# Altium PCB sonata-xl-panel.PcbDoc
Units mil, origin at the board's own origin, x right, y up, seen from the top; angles counter-clockwise.
Board outline 6653.54 x 3997.24 mil, 8 copper layers (Top Layer, Int1 (Sign), Int2 (GND), Int3 (Sign), Int4 (Sign), Int5 (PWR), Int6 (Sign), Bottom Layer), stack 60.424 mil thick; 4 components, 0 nets, 8 pads, 0 vias.
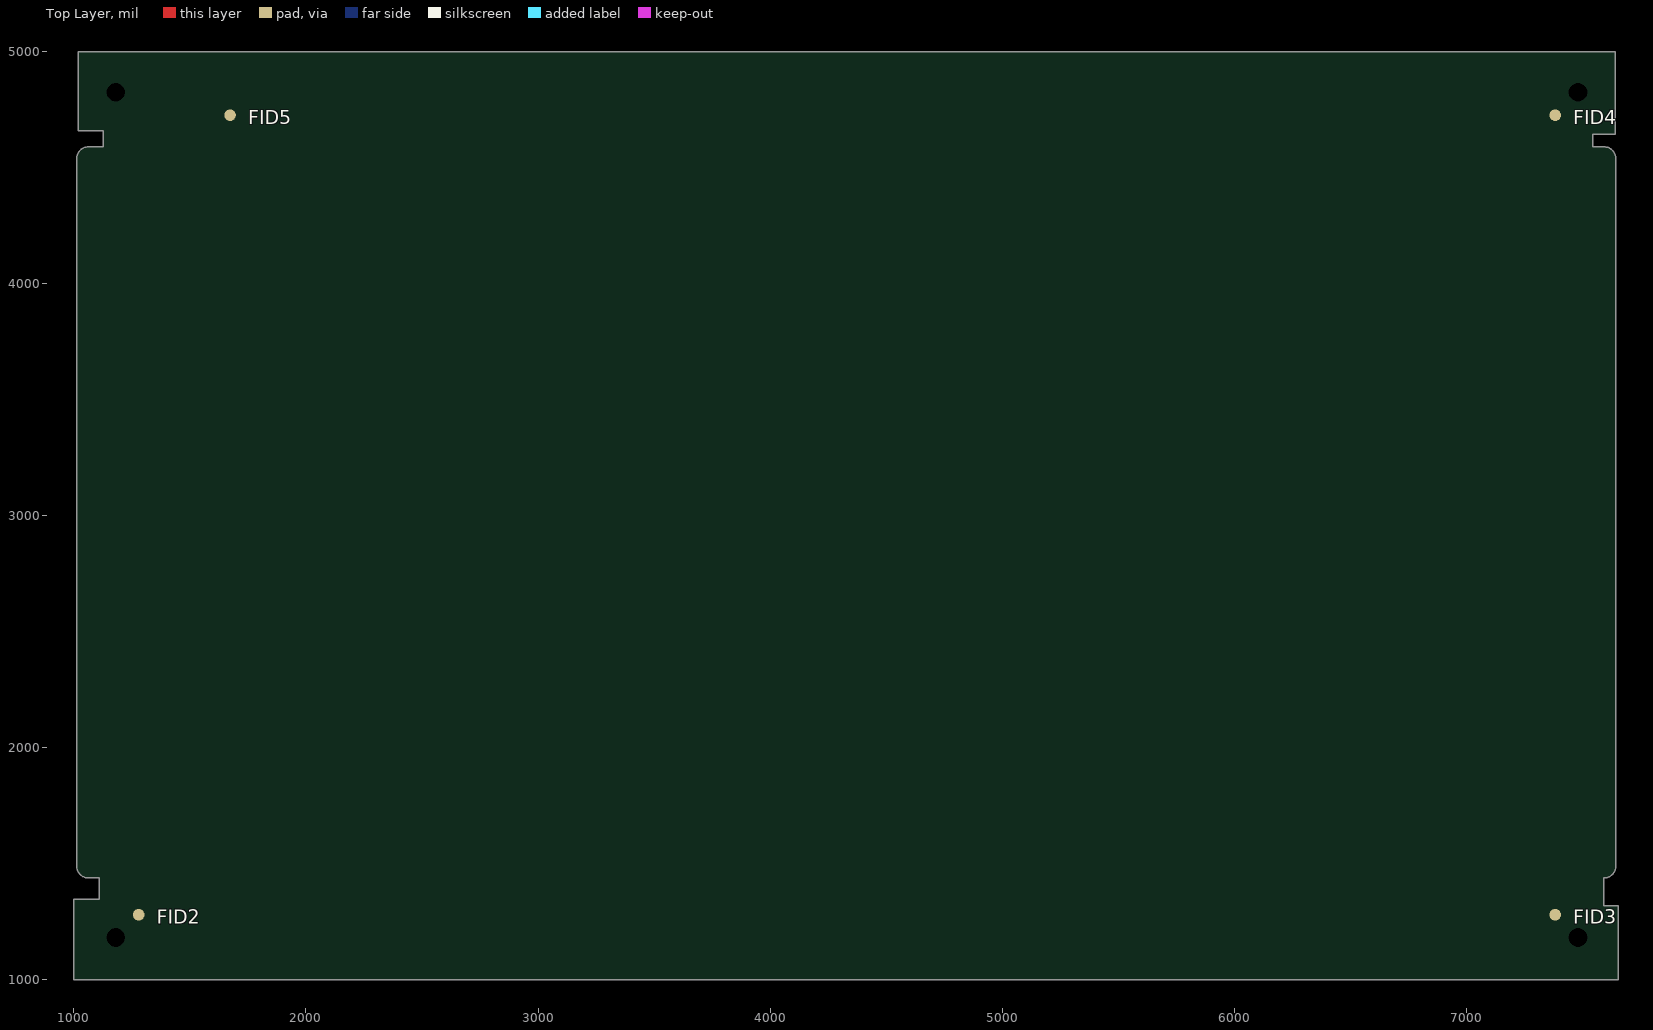
[diagram p0: Top Layer view]
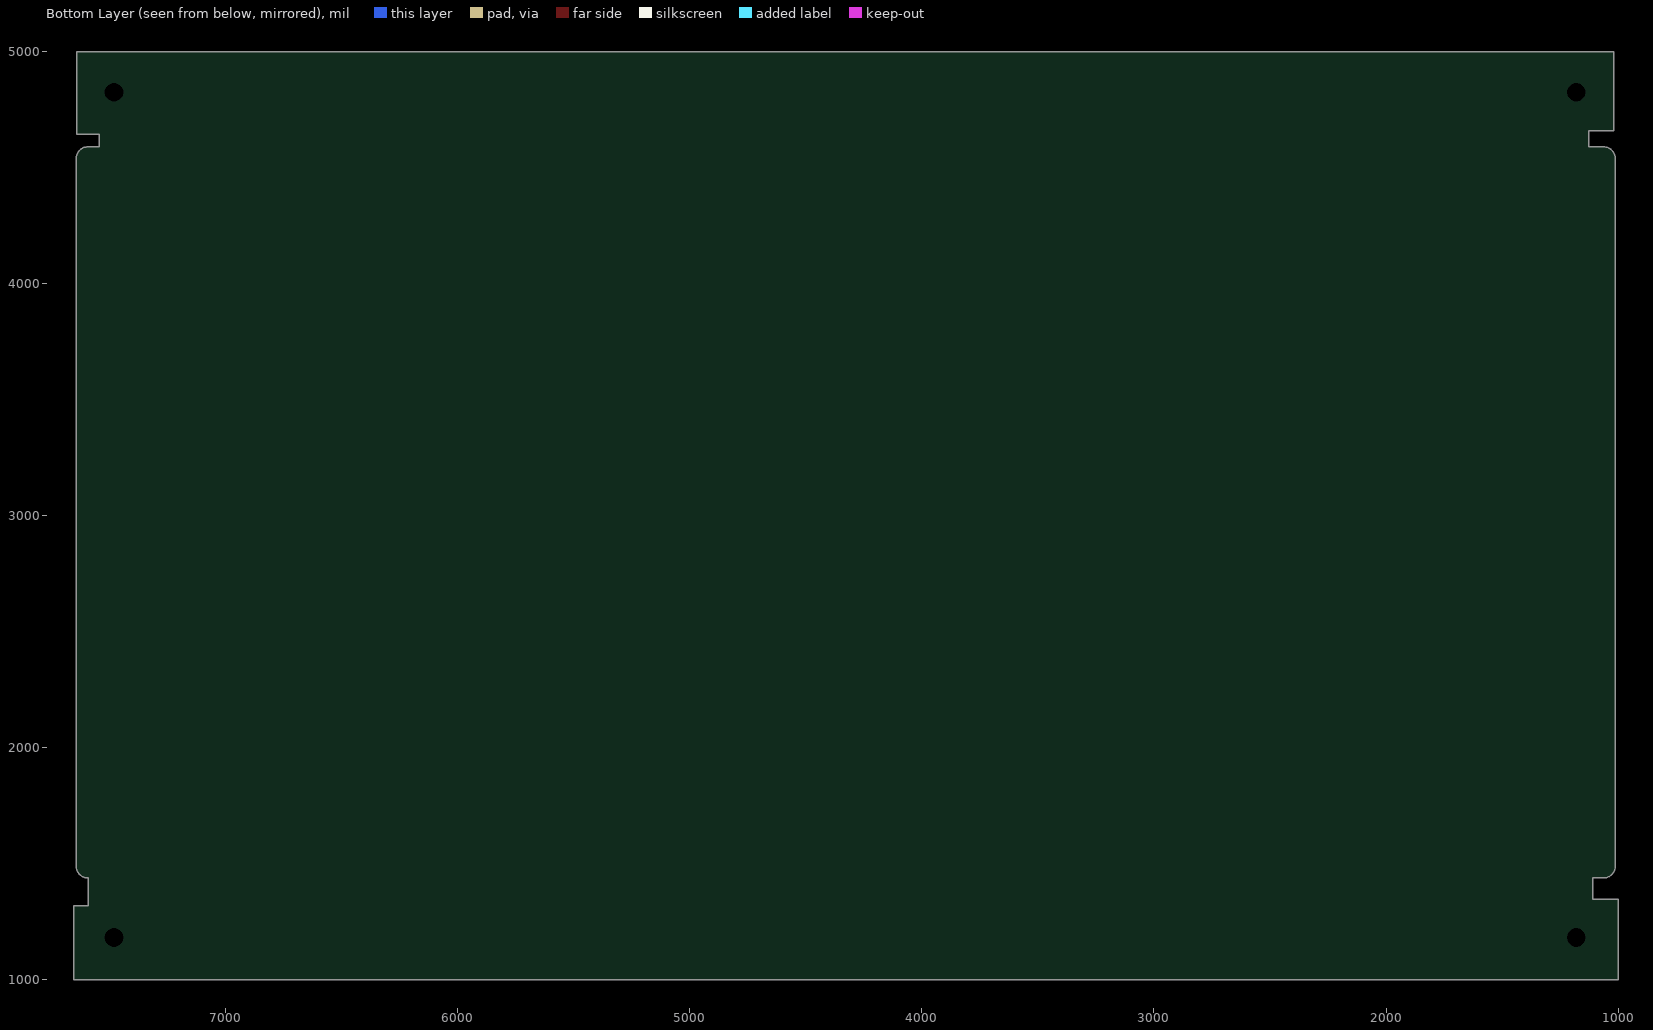
[diagram p1: Bottom Layer view, seen from below]

## Layer stack, top to bottom
Top Solder: solder mask 1, SM-001, Dk 4
Top Layer: signal copper 1.378
Dielectric 1: prepreg 2.8, PP-006, Dk 4.1
Dielectric 2: prepreg 2.8, PP-006, Dk 4.1
Int1 (Sign): signal copper 1.378
Dielectric 3: core 9, Core-027, Dk 4.5
Int2 (GND): signal copper 1.378
Dielectric 4: prepreg 2.8, PP-006, Dk 4.1
Dielectric 5: prepreg 2.8, PP-006, Dk 4.1
Int3 (Sign): signal copper 1.378
Dielectric 6: core 9, Core-027, Dk 4.5
Int4 (Sign): signal copper 1.378
Dielectric 7: prepreg 2.8, PP-006, Dk 4.1
Dielectric 8: prepreg 2.8, PP-006, Dk 4.1
Int5 (PWR): signal copper 1.378
Dielectric 9: core 9, Core-027, Dk 4.5
Int6 (Sign): signal copper 1.378
Dielectric 10: prepreg 2.8, PP-006, Dk 4.1
Dielectric 11: prepreg 2.8, PP-006, Dk 4.1
Bottom Layer: signal copper 1.378
Bottom Solder: solder mask 1, SM-001, Dk 4

## Board outline
1000,1000 1000,1346.46 1110.24,1346.46 1110.24,1438.19 1062.99,1438.19 cw(c1062.99,1488.19) 1012.99,1488.19 1012.99,4537.8 cw(c1062.99,4537.8) 1062.99,4587.8 1125.98,4587.8 1125.98,4657.48 1019.68,4657.48 1019.68,4997.24 1067.13,4997.24 7600.79,4997.24 7641.73,4997.24 7641.73,4641.73 7543.31,4641.73 7543.31,4587.8 7592.91,4587.8 cw(c7592.91,4537.8) 7642.91,4537.8 7642.91,1488.19 cw(c7592.91,1488.19) 7592.91,1438.19 7592.38,1438.57 7590.55,1438.57 7590.55,1318.9 7653.54,1318.9 7653.54,1000

## Design rules (kind name [scope] priority, off if disabled: settings)
Clearance [All] p1: gap=10 ignorepadtopadclearanceinfootprint=FALSE
PolygonConnect [All] p1: connectstyle=Relief reliefconductorwidth=10 reliefentries=4 polygonreliefangle="90 Angle" airgapwidth=10
RoutingVias [All] p1: holewidth=28 width=50 viastyle="Through Hole" minholewidth=28 minwidth=50 maxholewidth=28 maxwidth=50
SolderMaskExpansion [All] p1: expansion=4 istentingtop=FALSE
Width [All] p1: maxlimit=10 minlimit=10 preferedwidth=10
30 further rules are at their usual default settings.

## Components (designator, comment, footprint, x,y, rotation, side; value= is the part's Value field where it differs from the comment)
FID2 "Comment" FIDU-ROUND-1.0mm 1279.53,1279.53 r270 top
FID3 "Comment" FIDU-ROUND-1.0mm 7381.89,1279.53 r270 top
FID4 "Comment" FIDU-ROUND-1.0mm 7381.89,4724.41 r270 top
FID5 "Comment" FIDU-ROUND-1.0mm 1673.23,4724.41 r270 top

## Footprints (in the part's own frame and the unit in brackets; to place one, negate y for a bottom-side part, rotate by r counter-clockwise, add the part's x,y. Pads: shape width x height; smd on the part's side, far side on the other; paste and mask are expansions set on the pad)
FIDU-ROUND-1.0mm [mil]
  round 50 smd paste-78.74 mask+27.56: M1(0,0)

## Part data
FID2 FID3 FID4 FID5: library part FIDU-ROUND-1.0MM

## Free pads (board coordinates)
  round 0 hole 80.71: B_MH7(1181.1,1181.1) B_MH7(1181.1,4822.83) B_MH7(7480.31,1181.1) B_MH7(7480.31,4822.83)

## Nets (pads, with @x,y where several pads share a name; then routed paths per layer and width w, separated by ;. In a path a pad name is that pad's centre, name@x,y a point inside that pad or via, vN(x,y) a via of type N, cw(c..) or ccw(c..) an arc to the next point about the centre after c; other vN are vias at no path point)
pads on no net: FID2.M1 FID3.M1 FID4.M1 FID5.M1

## Silkscreen, mask and mechanical layers (free items; w line width, h text height)
VSCORE:
  lines w12: 996.06,1437.99 7622.05,1437.99 ; 1004.92,4588.58 7630.91,4588.58
Route Tool Path:
  lines w12: 1000,1000 1000,1346.46 1110.24,1346.46 1110.24,1438.19 1062.46,1438.19 ; 1062.99,4587.8 1125.98,4587.8 1125.98,4657.48 1019.68,4657.48 1019.68,4997.24 1067.13,4997.24 ; 7592.38,1438.57 7590.55,1438.57 7590.55,1318.9 7653.54,1318.9 7653.54,1000 ; 7592.91,4587.8 7543.31,4587.8 7543.31,4641.73 7641.73,4641.73 7641.73,4997.24 7600.79,4997.24
  lines w12.01: 1000,1000 7653.54,1000 ; 1062.99,1438.19 cw(c1062.99,1488.19) 1012.99,1488.19 1012.99,2934.25 1012.99,4537.8 cw(c1062.99,4537.8) 1062.99,4587.8 ; 1067.13,4997.24 7600.79,4997.24 ; 7592.91,1438.19 ccw(c7592.91,1488.19) 7642.91,1488.19 7642.91,4537.8 ccw(c7592.91,4537.8) 7592.91,4587.8

## Panel: embedded boards
"cheriot-test.PcbDoc" at 1012.46,1438.57, 1 rows x 1 columns, spacing 2500 x 1500, rotation 0